# Altium PCB PCB1.PcbDoc
Units mil, origin at the board's own origin, x right, y up, seen from the top; angles counter-clockwise.
Board outline 2480.03 x 2405.03 mil, 2 copper layers (Top Layer, Bottom Layer); 5 components, 10 nets, 49 pads, 6 vias.
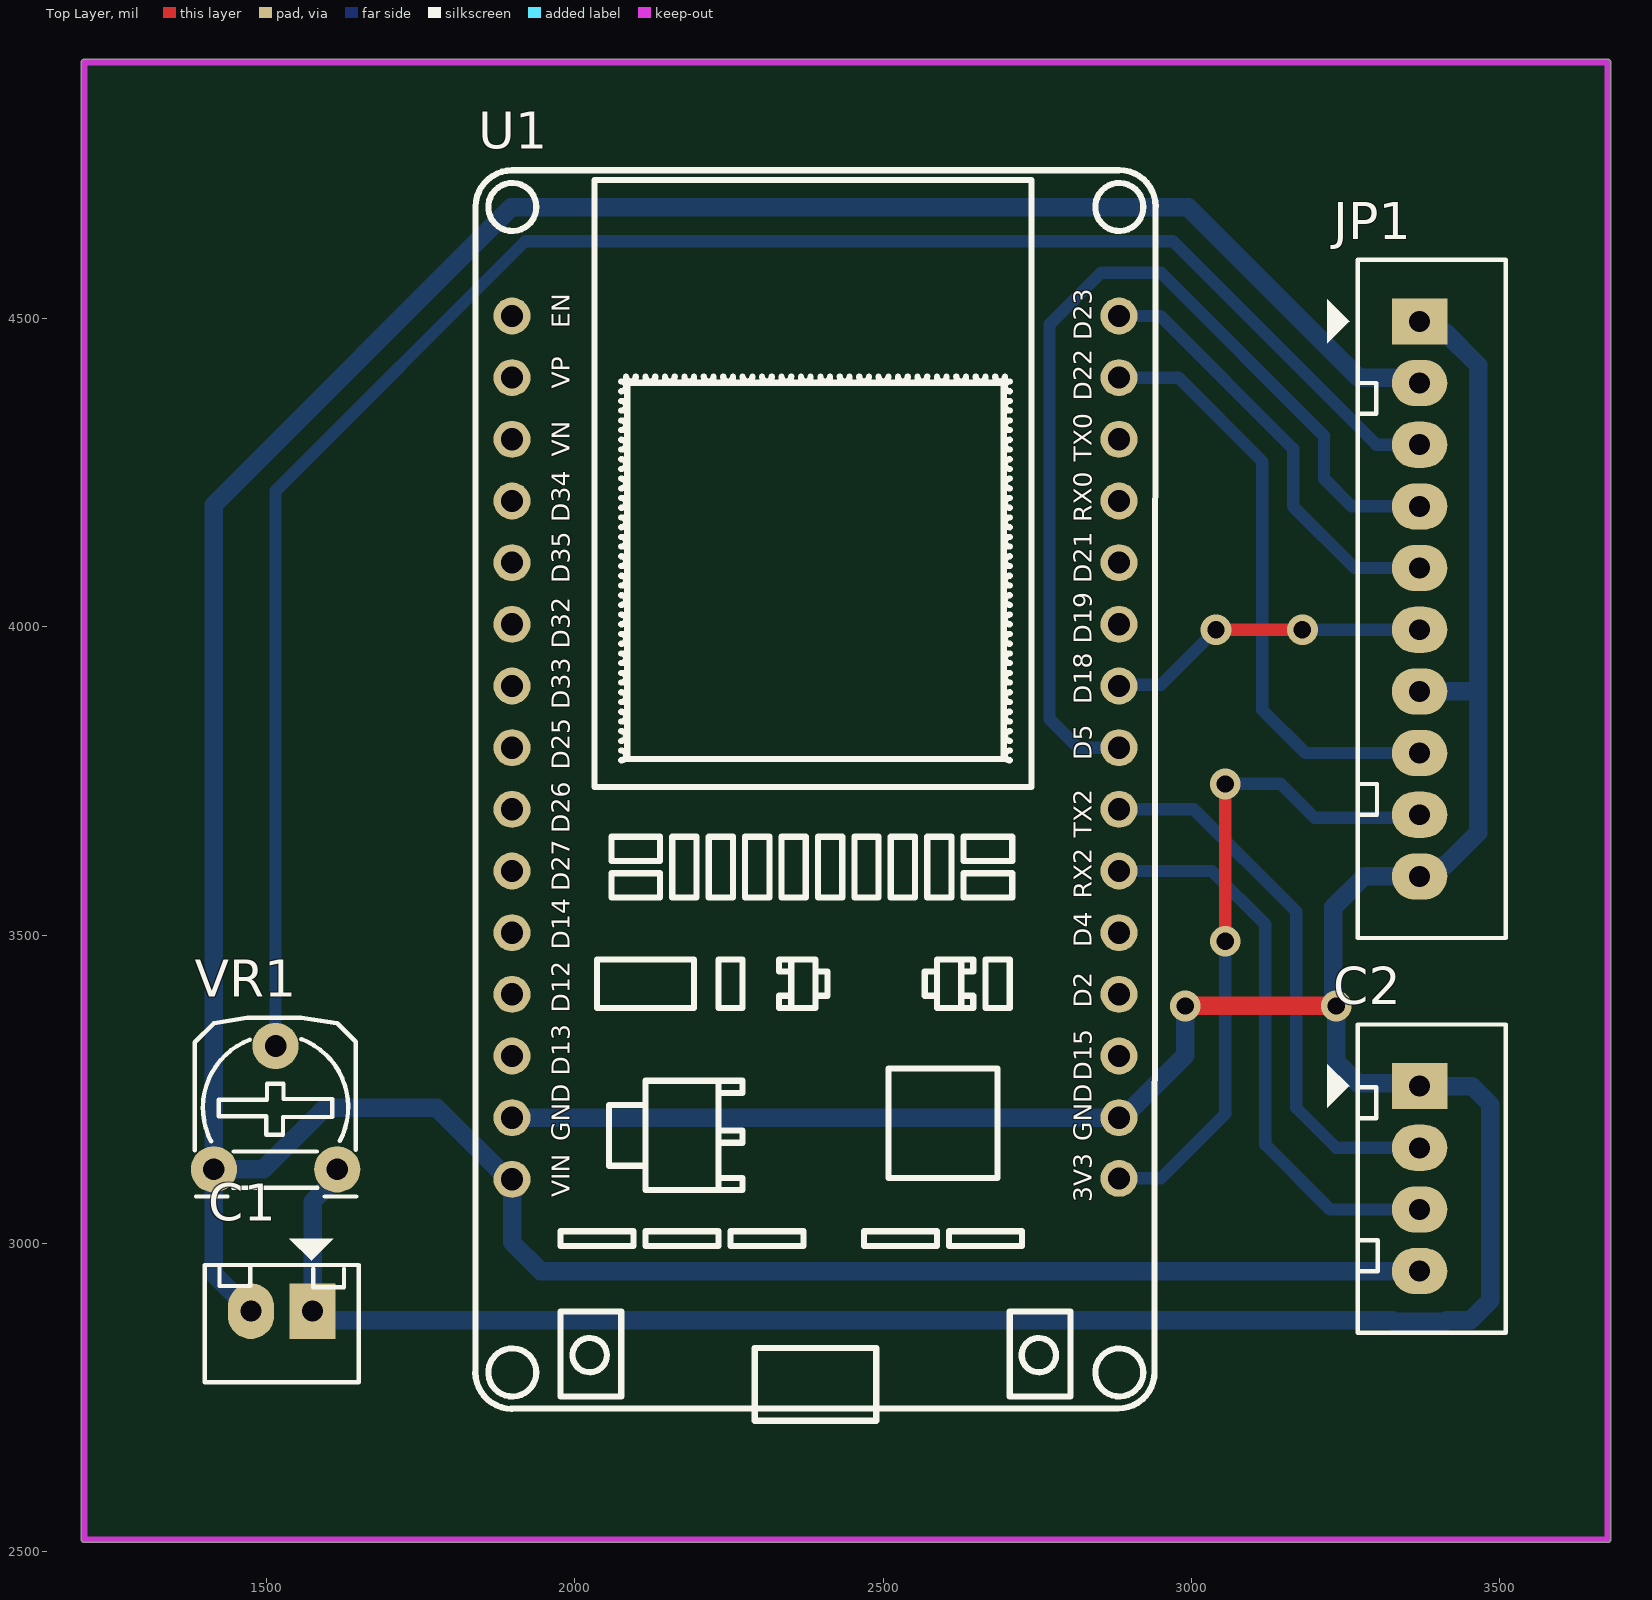
[diagram p0: Top Layer view]
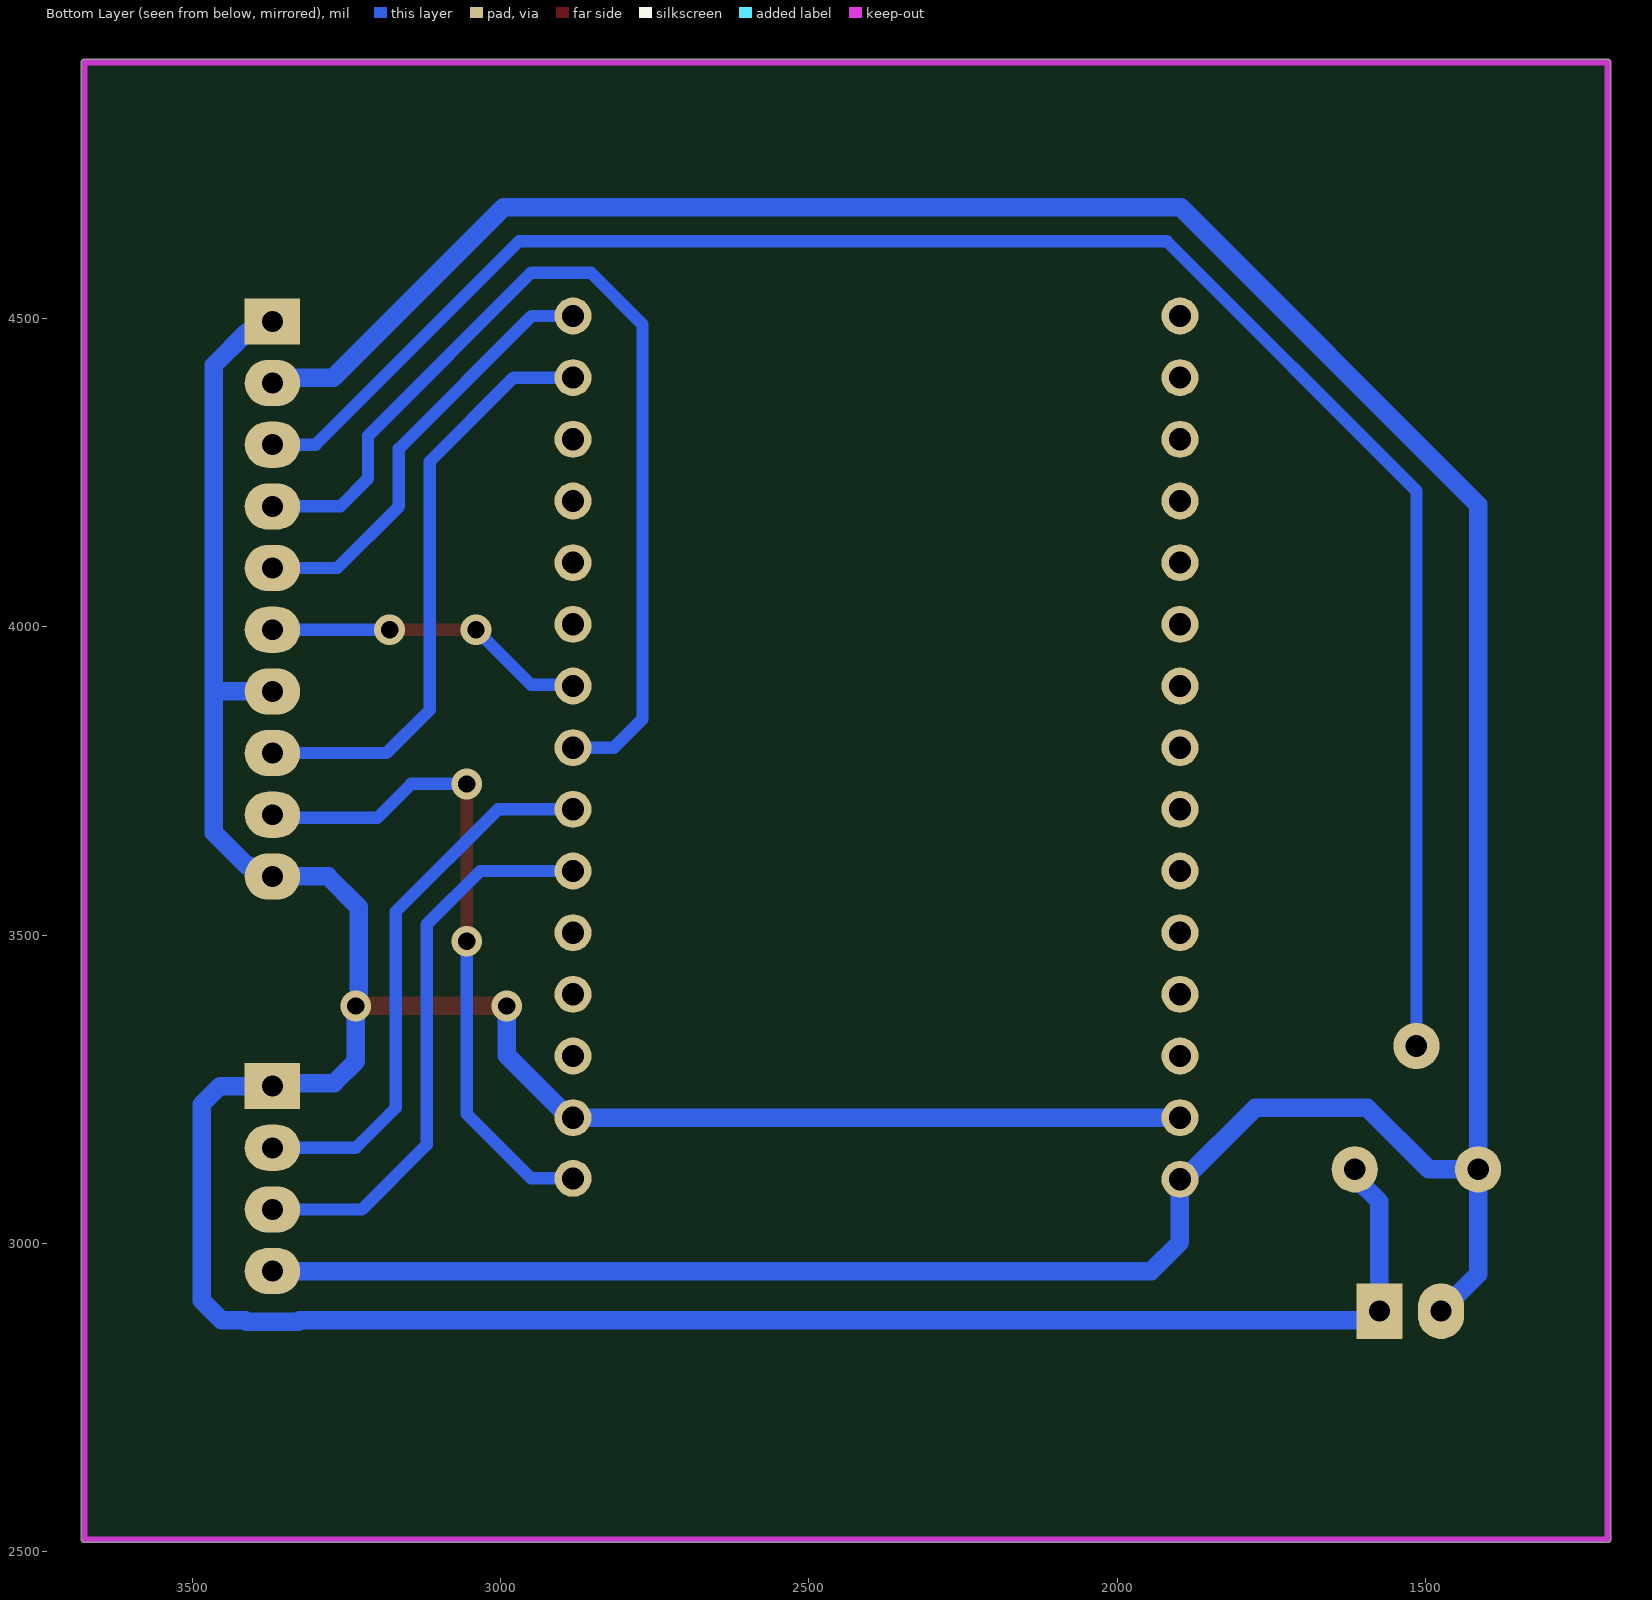
[diagram p1: Bottom Layer view, seen from below]
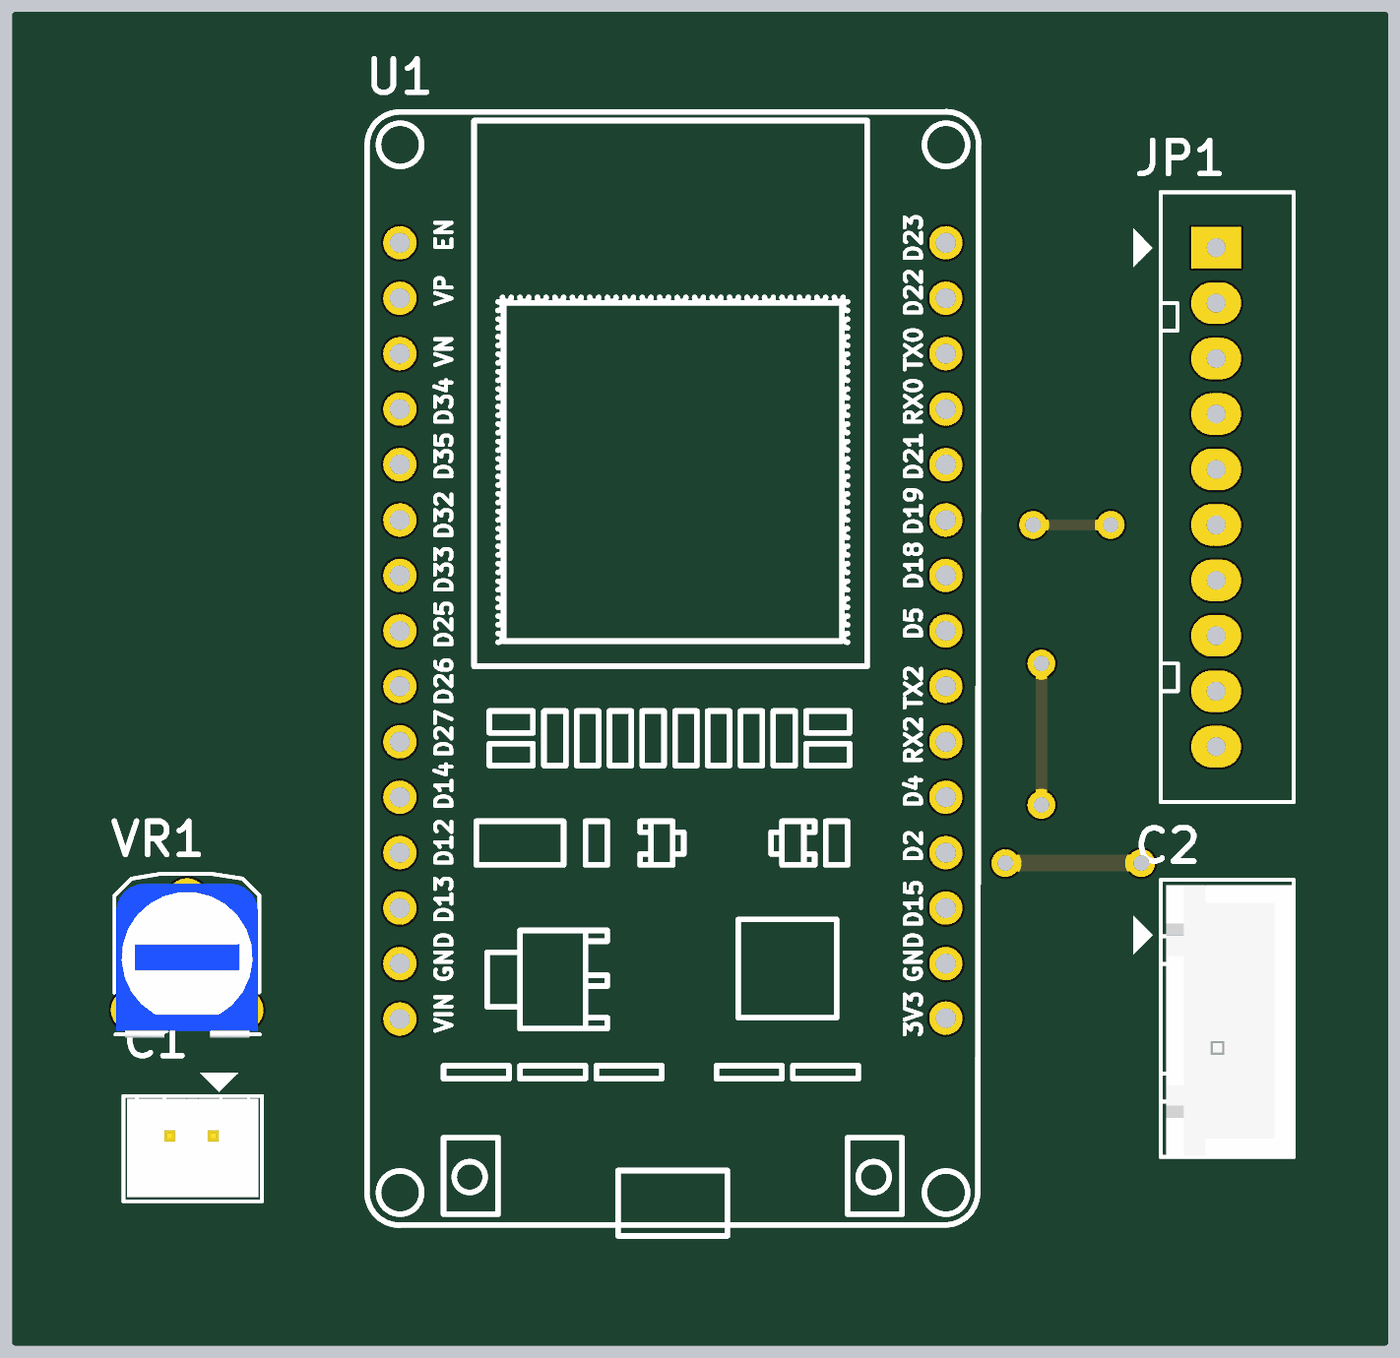
[diagram p2: 3D render of the assembled board from above, using the file's embedded part models]

## Layer stack, top to bottom
Top Solder: solder mask 0.4, Solder Resist, Dk 3.5
Top Layer: signal copper 1.4
Dielectric 1: dielectric 12.6, FR-4, Dk 4.8
Bottom Layer: signal copper 1.4
Bottom Solder: solder mask 0.4, Solder Resist, Dk 3.5

## Board outline
1199.99,2520 1199.98,4915 cw(c1205,4915) 1205,4920.02 3675,4920.02 cw(c3675,4915) 3680.01,4915 3680.01,2605 3680.01,2520 cw(c3675,2520) 3675,2514.99 1205,2514.99 cw(c1205,2520)

## Design rules (kind name [scope] priority, off if disabled: settings)
Clearance [All] p1: gap=30 ignorepadtopadclearanceinfootprint=FALSE
PolygonConnect [All] p1: connectstyle=Relief reliefconductorwidth=10 reliefentries=4 polygonreliefangle="90 Angle" airgapwidth=10
RoutingVias [All] p1: holewidth=28 width=50 viastyle="Through Hole" minholewidth=28 minwidth=50 maxholewidth=28 maxwidth=50
SolderMaskExpansion [All] p1: expansion=4 istentingtop=FALSE
Width VCC [InNet('VCC')] p1: maxlimit=30 minlimit=30 preferedwidth=30
Width GND [InNet('BLK')] p2: maxlimit=30 minlimit=30 preferedwidth=30
Width [All] p3: maxlimit=20 minlimit=20 preferedwidth=20
30 further rules are at their usual default settings.

## Classes and differential pairs
component class Sheet1: C1 C2 VR1

## Components (designator, comment, footprint, x,y, rotation, side; value= is the part's Value field where it differs from the comment)
C1 "Header2" Header2 1575,2890 r180 top
C2 "Header4" Header4 3370,3255 r270 top
JP1 "JP10" Header10 3370,4495 r270 top value="Connector 10"
U1 "ESP32_MODULE copy" ESP32-WIFIMODULE-FOOTPRINT 2474.32,3735.54 r0 top
VR1 "100K" "Bien Tro Tam Giac Dung" 1415,3120 r0 top

## Footprints (in the part's own frame and the unit in brackets; to place one, negate y for a bottom-side part, rotate by r counter-clockwise, add the part's x,y. Pads: shape width x height; smd on the part's side, far side on the other; paste and mask are expansions set on the pad)
"Bien Tro Tam Giac Dung" [mil] "RM065"
  round 75 hole 35: 1(0,0) 2(100,200) 3(200,0)
  silkscreen extent -31,-44 231,246, body extent -28,-50 228,228, height 279
ESP32-WIFIMODULE-FOOTPRINT [mil]
  round 60 hole 36: 1(-575.9,768.25) 2(-575.9,668.25) 3(-575.9,568.25) 4(-575.9,468.25) 5(-575.9,368.25) 6(-575.9,268.25) 7(-575.9,168.25) 8(-575.9,68.25) 9(-575.9,-31.75) 10(-575.9,-131.75) 11(-575.9,-231.75) 12(-575.9,-331.75) 13(-575.9,-431.75) 14(-575.9,-531.75) 15(-575.9,-631.75) 16(408.35,-630.18) 17(408.35,-531.75) 18(408.35,-431.75) 19(408.35,-331.75) 20(408.35,-231.75) 21(408.35,-131.75) 22(408.35,-31.75) 23(408.35,68.25) 24(408.35,168.25) 25(408.35,268.25) 26(408.35,368.25) 27(408.35,468.25) 28(408.35,568.25) 29(408.35,668.25) 30(408.35,768.25)
  silkscreen extent -635,-1023 468,1005
Header2 [mil] "CON2"
  rect 75x90 hole 34: 1(0,0)
  oval 75x90 hole 34: 2(100,0)
  silkscreen extent -75,-118 175,115, body extent -68,-70 168,107, height 236
Header4 [mil] "CON4"
  rect 75x90 hole 34: 1(0,0)
  oval 75x90 hole 34: 2(100,0) 3(200,0) 4(300,0)
  silkscreen extent -100,-150 400,140, body extent -90,-90 398,136, height 276
Header10 [mil] "CON10"
  rect 75x90 hole 34: 1(0,0)
  oval 75x90 hole 34: 2(100,0) 3(200,0) 4(300,0) 5(400,0) 6(500,0) 7(600,0) 8(700,0) 9(800,0) 10(900,0)
  silkscreen extent -100,-150 1000,140

## Part data
C1: "Header IDC, 2 x 1 Pin Vertical 2.54mm Pitch (Non-Boxed, Male)", Manufacturer="W¨¹rth Elektronik eiSos GmbH", partNo=613002143121, ComponentLink1 Description=Manufacturer, ComponentLink1URL=http://www.we-online.com, ComponentLink2 Description=Datasheet, ComponentLink2URL=http://katalog.we-online.de/em/datasheet/6130xx143121.pdf, Created by="Karrer Zheng", Created Date="29 March 2013", NoPins=02
C2: "Header IDC, 4 x 1 Pin Vertical 2.54mm Pitch (Non-Boxed, Male)", Manufacturer="W¨¹rth Elektronik eiSos GmbH", partNo=613002143121, ComponentLink1 Description=Manufacturer, ComponentLink1URL=http://www.we-online.com, ComponentLink2 Description=Datasheet, ComponentLink2URL=http://katalog.we-online.de/em/datasheet/6130xx143121.pdf, Created by="Karrer Zheng", Created Date="29 March 2013", NoPins=02
JP1: library part Header10, "Connector 10"
VR1: library part "Bien tro tam giac 100K Dung", "Cắm", Chung_Loai=Cắm, Don_Vi=Con, Ma_Hang=MH003711, Ten_Linh_Kien="Biến Trở Tam Giác 104-100K RM065"

## Via types
v1: diameter 50, hole 28, Top Layer to Bottom Layer, 6 vias

## Nets (pads, with @x,y where several pads share a name; then routed paths per layer and width w, separated by ;. In a path a pad name is that pad's centre, name@x,y a point inside that pad or via, vN(x,y) a via of type N, cw(c..) or ccw(c..) an arc to the next point about the centre after c; other vN are vias at no path point)
BLA: JP1.9 U1.16 | length 1090.5
  Top Layer w20: v1(3055,3490) v1(3055,3745)
  Bottom Layer w20: U1.16 2950.37,3105.37 3055,3210 v1(3055,3490) ; v1(3055,3745) 3145,3745 3200,3690 3365,3690 JP1.9
BLK: C1.1 C2.1 JP1.1 JP1.7 JP1.10 U1.14 U1.17 VR1.3 | length 5760.1
  Top Layer w30: v1(2990,3385) v1(3235,3385)
  Bottom Layer w30: VR1.3 1615,3107.82 1575,3067.82 C1.1 1590,2875 3325.83,2875 3328.33,2872.5 3411.67,2872.5 3414.17,2875 3452.22,2875 3485,2907.78 3485,3225 3455,3255 C2.1 3365,3260 3270,3260 3235,3295 v1(3235,3385) 3231.17,3388.83 3231.17,3402.97 3230,3404.14 3230,3545.06 3279.94,3595 JP1.10 3389.68,3595 3407.18,3612.5 3411.67,3612.5 3465,3665.83 3465,3895 ; U1.14 2888.74,3203.79 2990,3305.06 v1(2990,3385) ; JP1.1 3387.5,4477.5 3411.67,4477.5 3465,4424.17 3465,3895 ; JP1.7@3378.61,3903.61 JP1.7 3465,3895
E: JP1.6 U1.24 | length 525.1
  Top Layer w20: v1(3040,3995) v1(3180,3995)
  Bottom Layer w20: U1.24 2884.67,3905.79 2950.79,3905.79 v1(3040,3995) ; v1(3180,3995) JP1.6
R/W: JP1.5 U1.30 | length 711.5
  Bottom Layer w20: U1.30 2949.79,4503.79 3165,4288.58 3165,4195 3265,4095 JP1.5
RS: JP1.4 U1.23 | length 1604.1
  Bottom Layer w20: U1.23 2816.21,3803.79 2770,3850 2770,4490.12 2853.68,4573.79 2950.5,4573.79 3215,4309.29 3215,4240 3260,4195 JP1.4
RST: JP1.8 U1.29 | length 975.5
  Bottom Layer w20: U1.29 2979.08,4403.79 3115,4267.87 3115,3865 3185,3795 JP1.8
RX2: C2.2 U1.22 | length 901
  Bottom Layer w20: U1.22 3004.28,3703.79 3170,3538.08 3170,3220 3235,3155 C2.2
TX2: C2.3 U1.21 | length 923.7
  Bottom Layer w20: U1.21 3033.13,3603.79 3120,3516.92 3120,3160 3225,3055 C2.3
V0: JP1.3 VR1.2 | length 3059.4
  Bottom Layer w20: VR1.2 1515,4220 1920,4625 2970,4625 3300,4295 JP1.3
VCC: C1.2 C2.4 JP1.2 U1.15 VR1.1 | length 5771.5
  Bottom Layer w30: C1.2 1415,2950 VR1.1 ; C2.4 1945,2955 1898.42,3001.58 U1.15 1892.35,3103.79 1776.14,3220 1595,3220 1495,3120 VR1.1 ; JP1.2 3361.39,4403.61 3271.39,4403.61 2995,4680 1897.22,4680 1415,4197.78 VR1.1
pads on no net: U1.1 U1.2 U1.3 U1.4 U1.5 U1.6 U1.7 U1.8 U1.9 U1.10 U1.11 U1.12 U1.13 U1.18 U1.19 U1.20 U1.25 U1.26 U1.27 U1.28

## Keep-outs
Keep-Out Layer:
  lines w10: 1205,2520 3675,2520 3675,2605 3675,4915 1205,4915 1205,2520

## Text inside footprints (layer, text, board x,y; h text height)
U1: Top Overlay "VIN" at 1991.92,3074.66 h29.53 r90; Top Overlay "GND" at 1991.92,3165.2 h29.53 r90; Top Overlay "D13" at 1991.92,3271.51 h29.53 r90; Top Overlay "D12" at 1991.92,3373.86 h29.53 r90; Top Overlay "D14" at 1991.92,3476.24 h29.53 r90; Top Overlay "D27" at 1991.92,3570.72 h29.53 r90; Top Overlay "D26" at 1991.92,3665.2 h29.53 r90; Top Overlay "D25" at 1991.92,3767.57 h29.53 r90; Top Overlay "D33" at 1991.92,3865.99 h29.53 r90; Top Overlay "D32" at 1991.92,3964.43 h29.53 r90; Top Overlay "D35" at 1991.92,4070.72 h29.53 r90; Top Overlay "D34" at 1991.92,4169.15 h29.53 r90; Top Overlay "VN" at 1991.92,4275.44 h29.53 r90; Top Overlay "VP" at 1991.92,4385.68 h29.53 r90; Top Overlay "EN" at 1991.92,4484.1 h29.53 r90; Top Overlay "3V3" at 2838.38,3066.79 h29.53 r90; Top Overlay "GND" at 2838.38,3165.21 h29.53 r90; Top Overlay "D15" at 2838.38,3263.64 h29.53 r90; Top Overlay "D2" at 2838.38,3381.75 h29.53 r90; Top Overlay "D4" at 2838.38,3480.17 h29.53 r90; Top Overlay "RX2" at 2838.38,3558.91 h29.53 r90; Top Overlay "TX2" at 2838.38,3657.34 h29.53 r90; Top Overlay "D5" at 2838.38,3783.32 h29.53 r90; Top Overlay "D18" at 2838.38,3873.87 h29.53 r90; Top Overlay "D19" at 2838.38,3972.3 h29.53 r90; Top Overlay "D21" at 2838.38,4070.72 h29.53 r90; Top Overlay "RX0" at 2838.38,4169.15 h29.53 r90; Top Overlay "TX0" at 2838.38,4267.58 h29.53 r90; Top Overlay "D22" at 2838.38,4366 h29.53 r90; Top Overlay "D23" at 2838.38,4464.43 h29.53 r90